# Altium PCB Board.PcbDoc (part 1 of 2)
Units mil, origin at the board's own origin, x right, y up, seen from the top; angles counter-clockwise.
Board outline 3359.57 x 1791.01 mil, 4 copper layers (Top Layer, GND, Power, Bottom Layer), stack 61.811 mil thick; 87 components, 83 nets, 345 pads, 431 vias.
Unrouted connection lines stored in the file: 1.
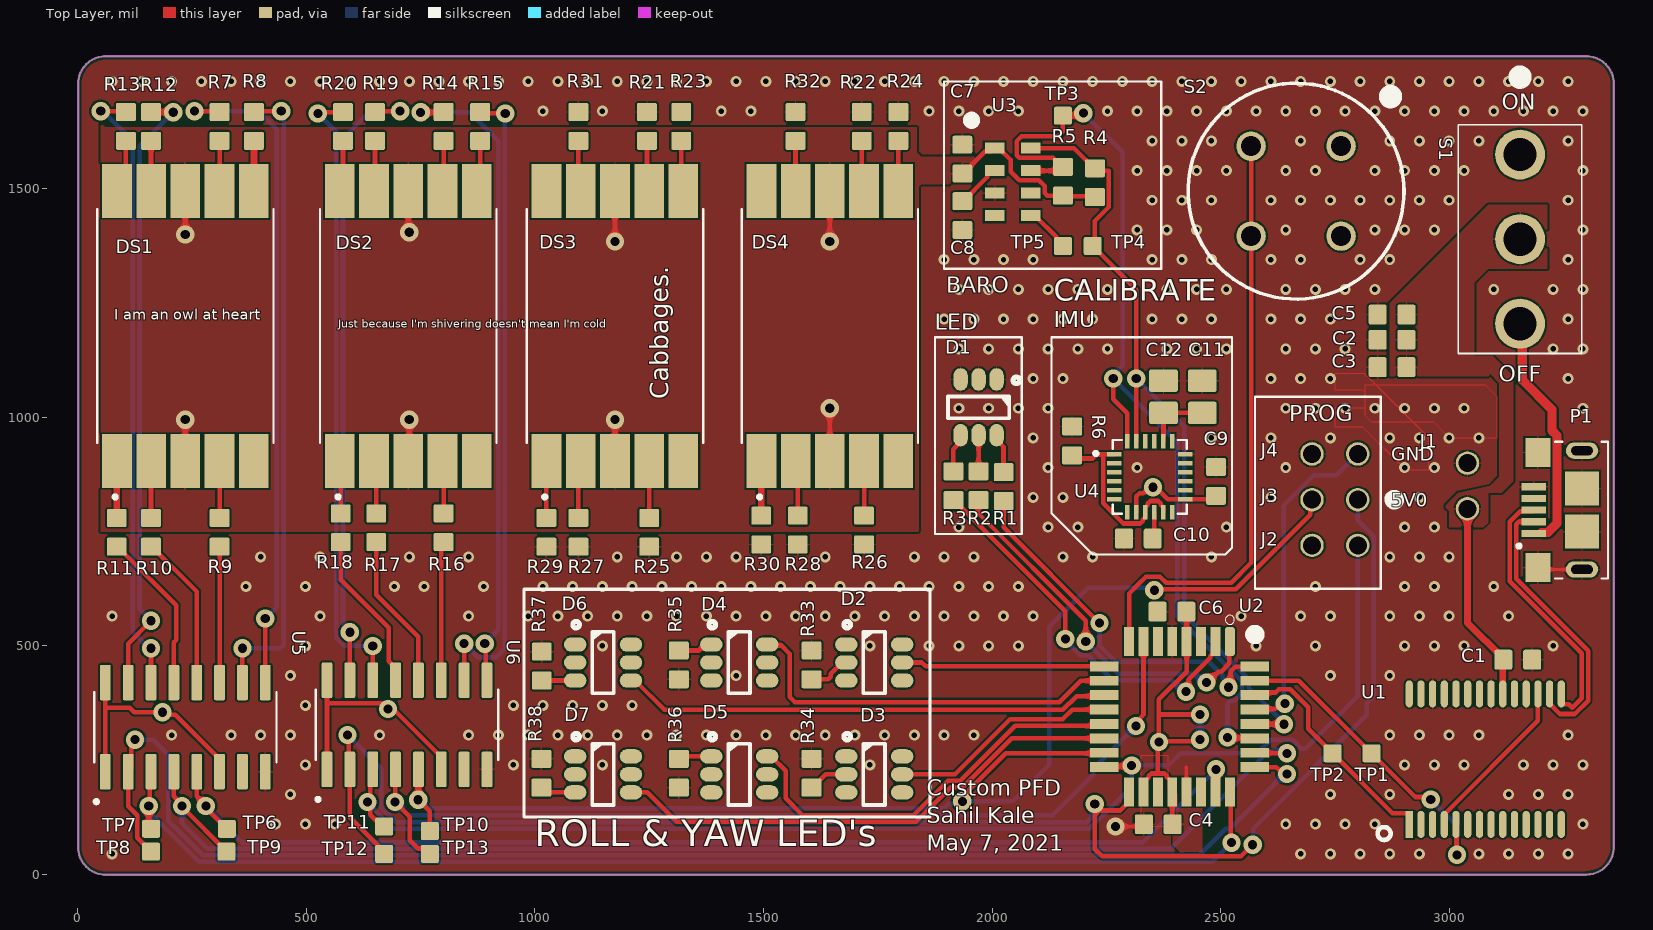
[diagram p0: Top Layer view]
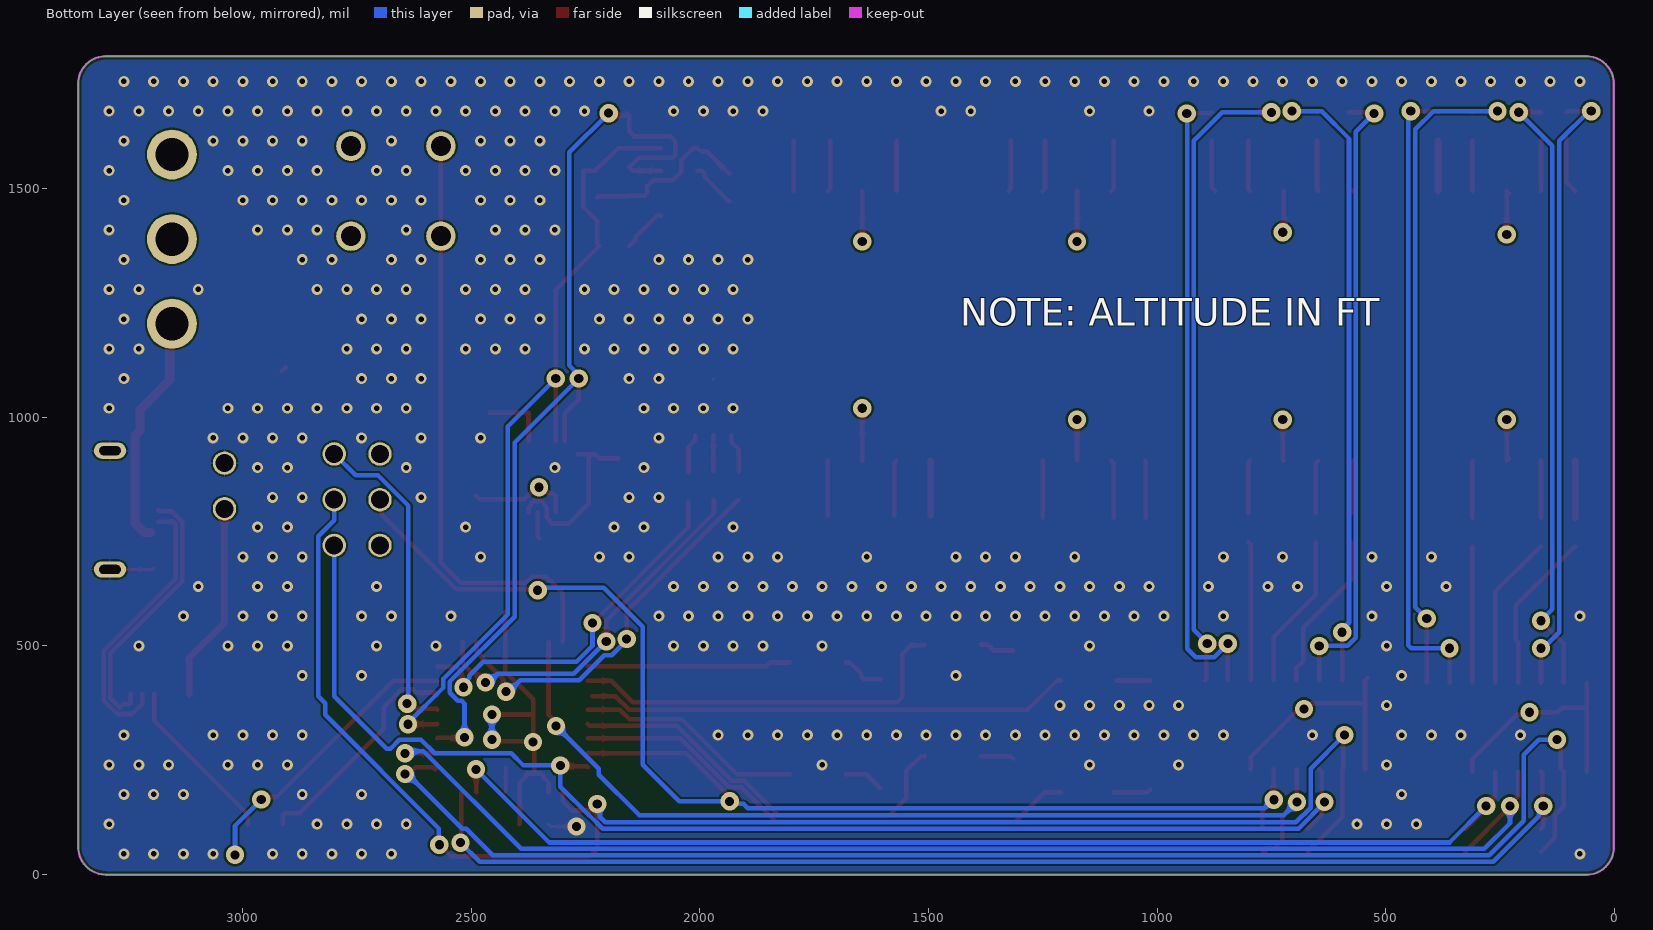
[diagram p1: Bottom Layer view, seen from below]
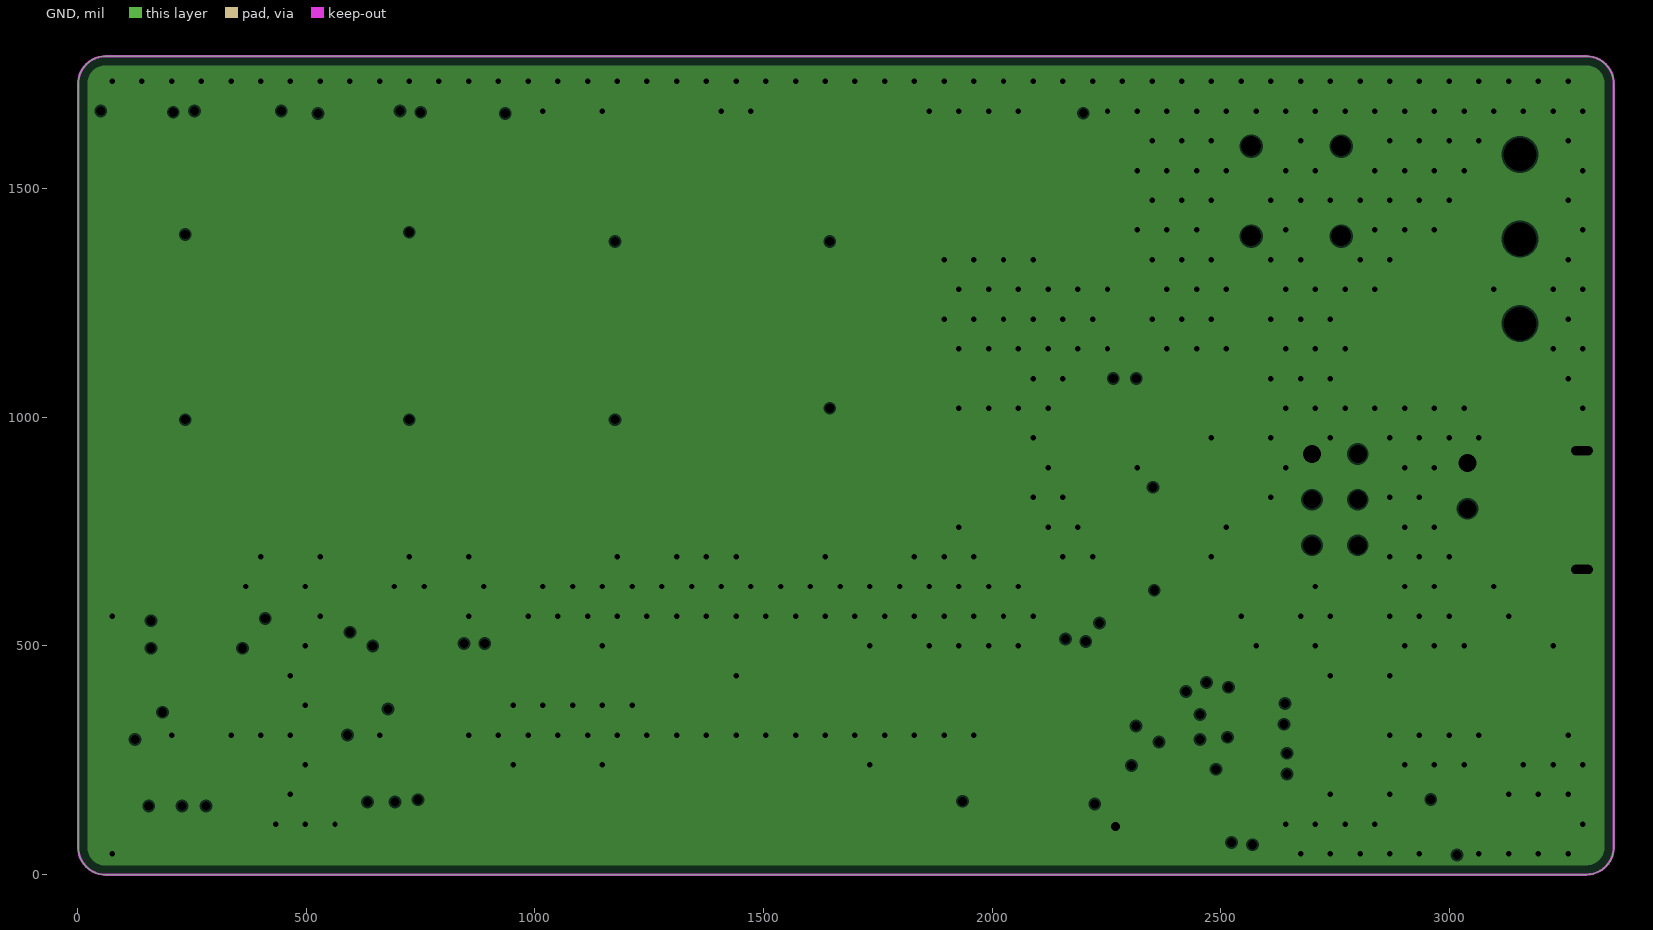
[diagram p2: GND, clearances drawn from the general rule]
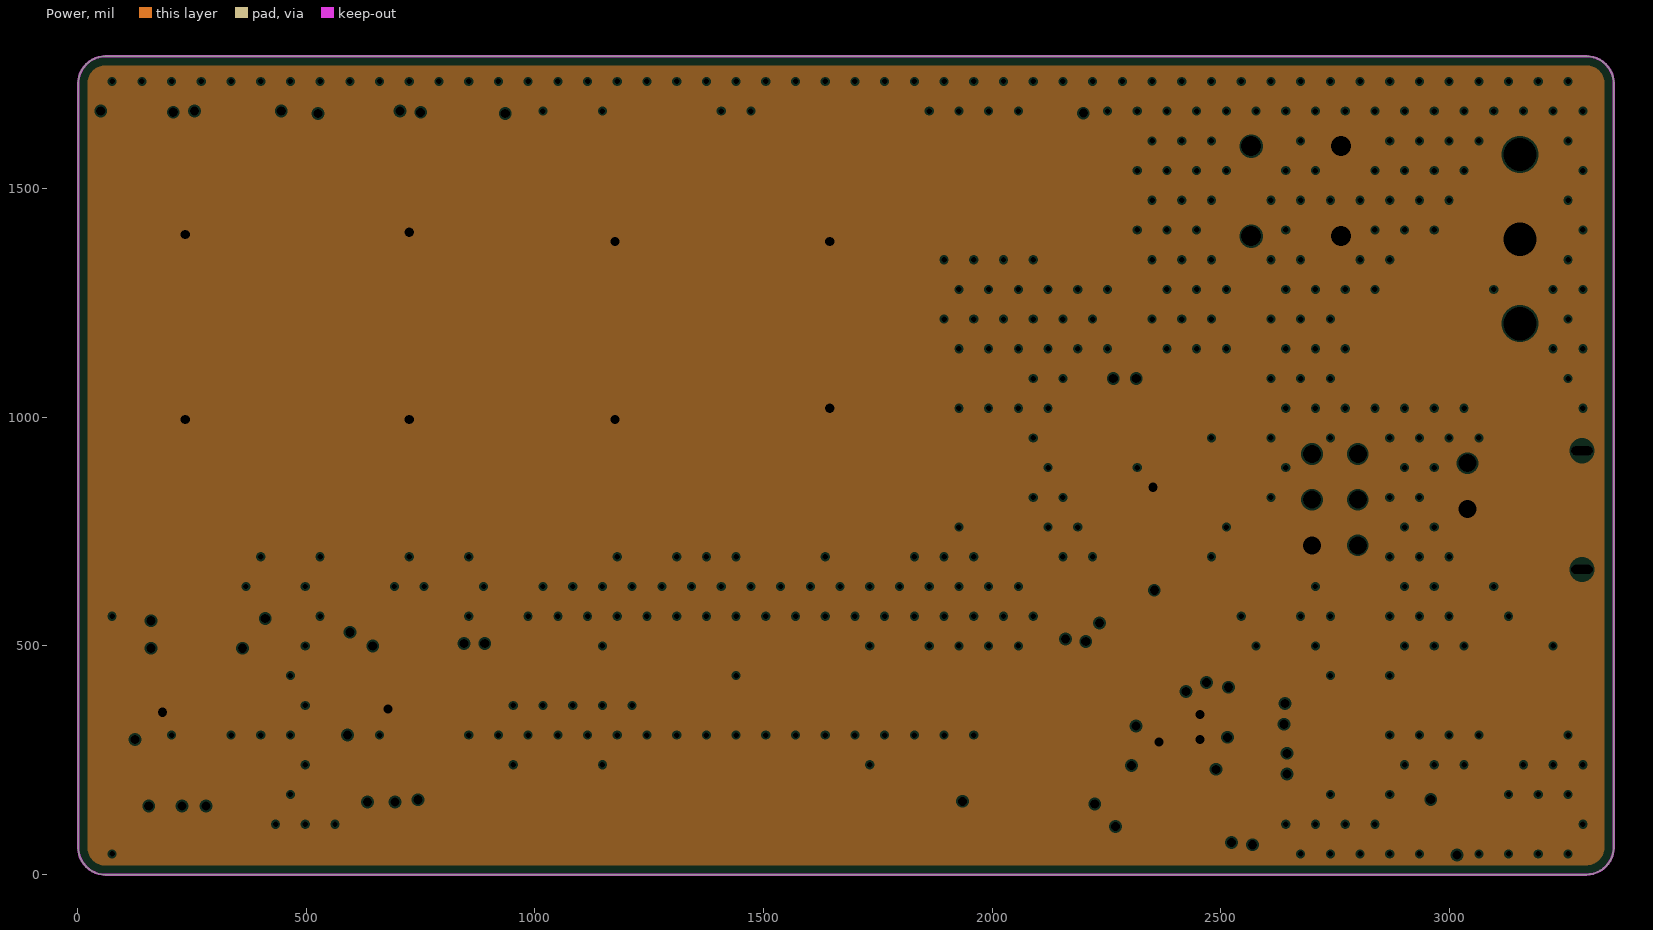
[diagram p3: Power, clearances drawn from the general rule]

## Layer stack, top to bottom
Top Solder: solder mask 0.5, Solder Resist, Dk 3.8
Top Layer: signal copper 1.378
Dielectric 1: prepreg 7.874, 7628, Dk 4.6
GND: plane copper 0.689, net GND
Core: core 41.929, FR-4, Dk 4.5
Power: plane copper 0.689, net 3V3
Dielectric 2: prepreg 7.874, 7628, Dk 4.6
Bottom Layer: signal copper 1.378
Bottom Solder: solder mask 0.5, Solder Resist, Dk 3.8

## Board outline
60.84,-0.8 cw(c60.84,59.41) 0.63,59.41 0.63,1730 cw(c60.84,1730) 60.84,1790.21 3300,1790.21 cw(c3300,1730) 3360.21,1730 3360.21,60 cw(c3300,60) 3300,-0.21 cw(c3298.56,1.23) 3298.56,-0.8

## Design rules (kind name [scope] priority, off if disabled: settings)
BoardOutlineClearance [All] p1: gap=7.87 ignorepadtopadclearanceinfootprint=FALSE
Clearance [All] p1: gap=4 ignorepadtopadclearanceinfootprint=FALSE except(5: Arc-Via Track-Via SMDPad-Via THPad-Via Via-Via Via-Fill Via-Poly Via-Region Via-Text; 9.84: Arc-Hole Track-Hole SMDPad-Hole THPad-Hole Via-Hole Fill-Hole Poly-Hole Region-Hole Text-Hole)
ComponentClearance [All] p1: gap=4 collisioncheckmode=3 verticalgap=4 showdistances=TRUE
DiffPairsRouting [All] p1: maxlimit=4 minlimit=4 mostfreqgap=4 toplayer_minwidth=4 toplayer_maxwidth=71497.94 toplayer_prefwidth=4 bottomlayer_minwidth=4 bottomlayer_maxwidth=71497.94 bottomlayer_prefwidth=4 maxuncoupledlength=500
Height [All] p1: minheight=0 maxheight=71497.94 prefheight=500
HoleSize [All] p1: absolutevalues=TRUE maxlimit=248.03 minlimit=7.87 maxpercent=80.000 minpercent=20.000
HoleToHoleClearance [All] p1: gap=9.84 allowstackedmicrovias=FALSE
MinimumAnnularRing [All] p1: minimumring=3
MinimumSolderMaskSliver [All] p1: minsoldermaskwidth=0
PlaneClearance [All] p1: clearance=4
PlaneConnect PlaneConnectPowerPads [InPadClass('PowerPads')] p1: planeconnectstyle=Direct reliefexpansion=20 reliefentries=4 reliefconductorwidth=10 reliefairgap=10
PlaneConnect [All] p2: pad.planeconnectstyle=Relief pad.reliefexpansion=11.81 pad.reliefentries=4 pad.reliefconductorwidth=4 pad.reliefairgap=4 via.planeconnectstyle=Direct via.reliefexpansion=11.81 via.reliefentries=4 via.reliefconductorwidth=5 via.reliefairgap=5
PolygonConnect PolygonConnectPowerPads [All vs (InPadClass('PowerPads'))] p1: connectstyle=Direct reliefconductorwidth=10 reliefentries=4 polygonreliefangle="90 Angle" airgapwidth=10
PolygonConnect [All] p2: thpad.connectstyle=Relief thpad.reliefconductorwidth=4 thpad.reliefentries=4 thpad.polygonreliefangle="90 Angle" thpad.airgapwidth=4 smdpad.connectstyle=Relief smdpad.reliefconductorwidth=4 smdpad.reliefentries=4 smdpad.polygonreliefangle="90 Angle" smdpad.airgapwidth=4 via.connectstyle=Direct via.reliefconductorwidth=5 via.reliefentries=4 via.polygonreliefangle="90 Angle" via.airgapwidth=5
RoutingVias [All] p1: holewidth=7.87 width=17.72 viastyle="Through Hole" minholewidth=7.87 minwidth=17.72 maxholewidth=248.03 maxwidth=257.87
SilkToSilkClearance [All] p1: silktosilkclearance=0
SilkToSolderMaskClearance [IsPad] p1: minsilkscreentomaskgap=4 clearancetoexposedcopper=TRUE
SolderMaskExpansion SolderMaskExpansion_1 [isVia] p1: expansion=4 istentingtop=TRUE
SolderMaskExpansion [All] p2: expansion=2.95 istentingtop=FALSE
Width [All] p1: maxlimit=71497.94 minlimit=4 preferedwidth=4
20 further rules are at their usual default settings.

## Classes and differential pairs
component class Coordination: D2 D3 D4 D5 D6 D7 R33 R34 R35 R36 R37 R38
component class "USB and Power": C1 C2 D1 J1 P1 R1 R2 R3 S1 TP1 TP2 U1
component class Sensors: C7 C8 C9 C10 C11 C12 R4 R5 R6 TP5 U3 U4
component class "Display Alt": DS1 DS2 DS3 DS4 R7 R8 R9 R10 R11 R12 R13 R14 R15 R16 R17 R18 R19 R20 R21 R22 R23 R24 R25 R26 R27 R28 R29 R30 R31 R32 TP6 TP7 TP8 TP9 TP10 TP11 TP12 TP13 U5 U6
component class Controller: C5 J2 J3 J4 S2 TP3 TP4 U2
differential pair USB: +USB_P -USB_N

## Components (designator, comment, footprint, x,y, rotation, side; value= is the part's Value field where it differs from the comment)
C1 "CAP_0.1uF_50V_0603" CAP0603 3150,470 r180 top value=0.1μF
C2 "CAP_4.7uF_16V_0603" CAP0603 2875,1170 r0 top value=4.7μF
C3 "CAP_0.1uF_16V_0603" CAP0603 2875,1110 r0 top value=0.1μF
C4 "CAP_0.1uF_16V_0603" CAP0603 2363.5,110 r0 top value=0.1μF
C5 "CAP_0.1uF_16V_0603" CAP0603 2875,1225 r0 top value=0.1μF
C6 "CAP_0.1uF_16V_0603" CAP0603 2393.5,575 r0 top value=0.1μF
C7 "CAP_0.1uF_16V_0603" CAP0603 1935,1565 r270 top value=0.1μF
C8 "CAP_0.1uF_16V_0603" CAP0603 1935,1441.5 r90 top value=0.1μF
C9 "CAP_0.1uF_16V_0603" CAP0603 2490,860 r270 top value=0.1μF
C10 "CAP_0.1uF_16V_0603" CAP0603 2320,735 r0 top value=0.1μF
C11 "CAP_1000pF_50V_0805" CAP0805 2460,1045 r270 top value=1000pF
C12 "CAP_1000pF_50V_0805" CAP0805 2375,1045 r270 top value=1000pF
D1 "LED_RGB_CLX6F" SOJ100P350X290-6N 1970.44,1021.97 r270 top
D2 "LED_RGB_CLX6F" SOJ100P350X290-6N 1742.06,463.72 r0 top
D3 "LED_RGB_CLX6F" SOJ100P350X290-6N 1742.06,218.85 r0 top
D4 "LED_RGB_CLX6F" SOJ100P350X290-6N 1446.82,463.72 r0 top
D5 "LED_RGB_CLX6F" SOJ100P350X290-6N 1446.82,218.85 r0 top
D6 "LED_RGB_CLX6F" SOJ100P350X290-6N 1148.99,463.72 r0 top
D7 "LED_RGB_CLX6F" SOJ100P350X290-6N 1148.99,218.85 r0 top
DS1 "VDMG10A0" DISPLAY_VDMG10A0 235,1200 r90 top
DS2 "VDMG10A0" DISPLAY_VDMG10A0 722.67,1200 r90 top
DS3 "VDMG10A0" DISPLAY_VDMG10A0 1175,1200 r90 top
DS4 "VDMG10A0" DISPLAY_VDMG10A0 1645,1200 r90 top
J1 "PIN_HEADER_1X2" "PIN_HEADER - 1X2" 3040,800 r0 top
J2 "PIN_HEADER_1X2" "PIN_HEADER - 1X2" 2700,720 r270 top
J3 "PIN_HEADER_1X2" "PIN_HEADER - 1X2" 2700,820 r270 top
J4 "PIN_HEADER_1X2" "PIN_HEADER - 1X2" 2700,920 r270 top
P1 "Micro Type B" FCI_10118193-0001LF 3237.93,797.24 r90 top
R1 "RES_120Ω_0603" RES0603 2025.44,879.96 r270 top value=120Ω
R2 "RES_120Ω_0603" RES0603 1970.44,881.97 r270 top value=120Ω
R3 "RES_120Ω_0603" RES0603 1915.44,881.97 r270 top value=120Ω
R4 "RES_4.7kΩ_0603" RES0603 2225,1482.01 r90 top value=4.7kΩ
R5 "RES_4.7kΩ_0603" RES0603 2155,1485 r90 top value=4.7kΩ
R6 "RES_4.7kΩ_0603" RES0603 2175,917.01 r90 top value=4.7kΩ
R7 "470R 1%" RES0603 310,1667.99 r270 top value=470Ω
R8 "470R 1%" RES0603 385,1667.99 r270 top value=470Ω
R9 "470R 1%" RES0603 310,717.01 r90 top value=470Ω
R10 "470R 1%" RES0603 160,717.01 r90 top value=470Ω
R11 "470R 1%" RES0603 85,717.01 r90 top value=470Ω
R12 "470R 1%" RES0603 160,1667.99 r270 top value=470Ω
R13 "470R 1%" RES0603 105,1667.99 r270 top value=470Ω
R14 "470R 1%" RES0603 800,1667.99 r270 top value=470Ω
R15 "470R 1%" RES0603 880,1667.99 r270 top value=470Ω
R16 "470R 1%" RES0603 800,727.01 r90 top value=470Ω
R17 "470R 1%" RES0603 652.8,727.01 r90 top value=470Ω
R18 "470R 1%" RES0603 575,727.01 r90 top value=470Ω
R19 "470R 1%" RES0603 650,1667.99 r270 top value=470Ω
R20 "470R 1%" RES0603 580,1667.99 r270 top value=470Ω
R21 "470R 1%" RES0603 1245,1667.99 r270 top value=470Ω
R22 "470R 1%" RES0603 1715,1667.99 r270 top value=470Ω
R23 "RES_120Ω_0603" RES0603 1320,1667.99 r270 top value=120Ω
R24 "470R 1%" RES0603 1795,1667.99 r270 top value=470Ω
R25 "470R 1%" RES0603 1250,717.01 r90 top value=470Ω
R26 "470R 1%" RES0603 1720,722.01 r90 top value=470Ω
R27 "470R 1%" RES0603 1095,717.01 r90 top value=470Ω
R28 "470R 1%" RES0603 1575,722.01 r90 top value=470Ω
R29 "470R 1%" RES0603 1025,717.01 r90 top value=470Ω
R30 "470R 1%" RES0603 1495,722.01 r90 top value=470Ω
R31 "470R 1%" RES0603 1095,1667.99 r270 top value=470Ω
R32 "470R 1%" RES0603 1570,1667.99 r270 top value=470Ω
R33 "470R 1%" RES0603 1605,490 r270 top value=470Ω
R34 "470R 1%" RES0603 1605,252.99 r270 top value=470Ω
R35 "470R 1%" RES0603 1314.76,427.01 r90 top value=470Ω
R36 "470R 1%" RES0603 1314.76,190 r90 top value=470Ω
R37 "470R 1%" RES0603 1015,487.35 r270 top value=470Ω
R38 "470R 1%" RES0603 1013.99,252.99 r270 top value=470Ω
S1 "SW_TOGGLE_SPDT" 100SP1T1B4M2QE 3155,1390 r270 top
S2 "SW_MOMENTARY_SPST" D6R 2665,1495 r90 top
TP1 "TESTPT" "TESTPT SQUARE" 2830,265 r180 top
TP2 "TESTPT" "TESTPT SQUARE" 2745,265 r180 top
TP3 "TESTPT" "TESTPT SQUARE" 2155,1660 r90 top
TP4 "TESTPT" "TESTPT SQUARE" 2220,1375 r90 top
TP5 "TESTPT" "TESTPT SQUARE" 2155,1375 r90 top
TP6 "TESTPT" "TESTPT SQUARE" 325.73,100 r90 top
TP7 "TESTPT" "TESTPT SQUARE" 160,100 r90 top
TP8 "TESTPT" "TESTPT SQUARE" 160,50 r90 top
TP9 "TESTPT" "TESTPT SQUARE" 325,50 r90 top
TP10 "TESTPT" "TESTPT SQUARE" 770,95 r90 top
TP11 "TESTPT" "TESTPT SQUARE" 670,105 r90 top
TP12 "TESTPT" "TESTPT SQUARE" 670,45 r90 top
TP13 "TESTPT" "TESTPT SQUARE" 770,45 r90 top
U1 "FT232RL" FT232RL 2912.64,109.57 r90 top
U2 "ATMEGA328PB-AU" QFP80P900X900X120-32N 2410,345 r270 top
U3 "MPL115A2" "LGA8 - MPL115A2" 2045,1515 r0 top
U4 "MPU-6050" QFN50P400X400X95-24N 2345,870 r0 top
U5 "CD4543BM96" SOIC127P600X175-16N 235,322.44 r90 top
U6 "CD4543BM96" SOIC127P600X175-16N 720,327.44 r90 top

## Footprints (in the part's own frame and the unit in brackets; to place one, negate y for a bottom-side part, rotate by r counter-clockwise, add the part's x,y. Pads: shape width x height; smd on the part's side, far side on the other; paste and mask are expansions set on the pad)
100SP1T1B4M2QE [mm]
  round 2.775 hole 1.85: 1(-4.7,0) 2(0,0) 3(4.7,0)
  silkscreen extent -9.3,-3.43 6.35,3.43, body extent -6.35,-3.43 6.35,3.43, height 29.63
CAP0603 [mm]
  rrect20% 1x1.1 smd: 1(-0.8,0) 2(0.8,0)
  body extent -0.87,-0.48 0.88,0.48, height 0.87
CAP0805 [mm]
  rrect20% 1.25x1.6 smd: 1(-0.895,0) 2(0.895,0)
  body extent -1.1,-0.7 1.1,0.75, height 1.41
D6R [mm]
  round 1.64 hole 1.1: 1(2.5,-2.5) 2(-2.5,-2.5) 3(-2.5,2.5) 4(2.5,2.5)
  silkscreen extent -6,-6 6,6, body extent -5.4,-6 6,6, height 12.8
DISPLAY_VDMG10A0 [mm]
  rect 3x1.65 smd: 1(-7.5,3.8) 2(-7.5,1.9) 3(-7.5,0) 4(-7.5,-1.9) 5(-7.5,-3.8) 6(7.5,-3.8) 7(7.5,-1.9) 8(7.5,0) 9(7.5,1.9) 10(7.5,3.8)
  silkscreen extent -9.6,-4.9 6.5,4.9, body extent -7.63,-4.85 7.37,4.95, height 4
FCI_10118193-0001LF [mm]
  rect 0.4x1.35 smd: 1(-1.3,1.338) 2(-0.65,1.338) 3(0,1.338) 4(0.65,1.338) 5(1.3,1.338)
  rect 1.6x1.4 smd: S1(-3.2,1.112) S2(3.2,1.112)
  rect 1.9x1.9 smd: S3(1.2,-1.338) S4(-1.2,-1.338)
  oval 0.9x1.8 hole 0.5 slot 1.2 at 90 deg: S5(-3.3,-1.338) S6(3.3,-1.338)
  silkscreen extent -3.8,-2.79 3.8,2.26, body extent -3.94,-4.07 3.92,1.64, height 2.8
FT232RL [mm]
  rect 1.5x0.4 smd: 1(0,0)
  oval 1.5x0.4 smd: 2(0,-0.65) 3(0,-1.3) 4(0,-1.95) 5(0,-2.6) 6(0,-3.25) 7(0,-3.9) 8(0,-4.55) 9(0,-5.2) 10(0,-5.85) 11(0,-6.5) 12(0,-7.15) 13(0,-7.8) 14(0,-8.45) 15(7.25,-8.45) 16(7.25,-7.8) 17(7.25,-7.15) 18(7.25,-6.5) 19(7.25,-5.85) 20(7.25,-5.2) 21(7.25,-4.55) 22(7.25,-3.9) 23(7.25,-3.25) 24(7.25,-2.6) 25(7.25,-1.95) 26(7.25,-1.3) 27(7.25,-0.65) 28(7.25,0)
  silkscreen extent -0.87,1.04 -0.15,1.75, body extent -0.09,-9.31 7.71,0.89, height 2
"LGA8 - MPL115A2" [mil]
  rect 43x24 smd: 1(-39.5,73.82) 2(-39.5,24.61) 3(-39.5,-24.61) 4(-39.5,-73.82) 5(39.5,-73.82) 6(39.5,-24.61) 7(39.5,24.61) 8(39.5,73.82)
  silkscreen extent -95,130 -85,140, body extent -59,-84 59,95, height 39
"PIN_HEADER - 1X2" [mm]
  round 1.3 hole 1: 1(0,0) 2(0,2.54)
  body extent -1.27,-1.29 1.27,3.79, height 8.38
QFN50P400X400X95-24N [mm]
  rect 0.79x0.26 smd: 1(-1.97,1.25) 2(-1.97,0.75) 3(-1.97,0.25) 4(-1.97,-0.25) 5(-1.97,-0.75) 6(-1.97,-1.25) 13(1.97,-1.25) 14(1.97,-0.75) 15(1.97,-0.25) 16(1.97,0.25) 17(1.97,0.75) 18(1.97,1.25)
  rect 0.26x0.79 smd: 7(-1.25,-1.97) 8(-0.75,-1.97) 9(-0.25,-1.97) 10(0.25,-1.97) 11(0.75,-1.97) 12(1.25,-1.97) 19(1.25,1.97) 20(0.75,1.97) 21(0.25,1.97) 22(-0.25,1.97) 23(-0.75,1.97) 24(-1.25,1.97)
  silkscreen extent -3.1,-2.05 2.05,2.05, body extent -2,-2 2,2, height 0.93
QFP80P900X900X120-32N [mm]
  rrect50% 1.6x0.55 smd: 1(-4.18,2.8)
  rect 1.6x0.55 smd: 2(-4.18,2) 3(-4.18,1.2) 4(-4.18,0.4) 5(-4.18,-0.4) 6(-4.18,-1.2) 7(-4.18,-2) 8(-4.18,-2.8) 17(4.18,-2.8) 18(4.18,-2) 19(4.18,-1.2) 20(4.18,-0.4) 21(4.18,0.4) 22(4.18,1.2) 23(4.18,2) 24(4.18,2.8)
  rect 0.55x1.6 smd: 9(-2.8,-4.18) 10(-2,-4.18) 11(-1.2,-4.18) 12(-0.4,-4.18) 13(0.4,-4.18) 14(1.2,-4.18) 15(2,-4.18) 16(2.8,-4.18) 25(2.8,4.18) 26(2,4.18) 27(1.2,4.18) 28(0.4,4.18) 29(-0.4,4.18) 30(-1.2,4.18) 31(-2,4.18) 32(-2.8,4.18)
  silkscreen extent -5.64,2.55 -4.45,4.32, body extent -4.5,-4.43 4.5,4.57, height 1.23
RES0603 [mm] "Chip Resistor, Body 1.6x0.8mm, IPC Medium Density"
  rrect15% 1x1.1 smd: 1(0,0) 2(1.6,0)
  body extent 0,-0.4 1.6,0.4, height 0.46
SOIC127P600X175-16N [mm]
  rrect25% 1.97x0.6 smd: 1(-2.475,4.445) 2(-2.475,3.175) 3(-2.475,1.905) 4(-2.475,0.635) 5(-2.475,-0.635) 6(-2.475,-1.905) 7(-2.475,-3.175) 8(-2.475,-4.445) 9(2.475,-4.445) 10(2.475,-3.175) 11(2.475,-1.905) 12(2.475,-0.635) 13(2.475,0.635) 14(2.475,1.905) 15(2.475,3.175) 16(2.475,4.445)
  silkscreen extent -4.24,-5.06 1.95,5.06, body extent -3.13,-4.95 2.87,4.95, height 1.75
SOJ100P350X290-6N [mm]
  oval 1.25x0.8 smd: 1(-1.55,1) 2(-1.55,0) 3(-1.55,-1) 4(1.55,-1) 5(1.55,0) 6(1.55,1)
  silkscreen extent -1.72,-1.7 0.6,2.32, body extent -1.85,-1.75 1.85,1.75, height 2.82
"TESTPT SQUARE" [mm]
  rrect20% 1x1 smd: 1(0,0)

## Part data
C1: "CAP CER 0.1UF 50V X7R 0603", Dielectric=X7R, Manufacturer 1=Yageo, Manufacturer Part Number 1=CC0603KRX7R9BB104, Package/Footprint=0603, Supplier Part Number 1=311-1344-1-ND, Voltage Rating=50V, Mounting Type=SMD, Supplier 1=Digi-Key
C2: "CAP CER 4.7UF 16V X6S 0603", Dielectric=X6S, Manufacturer 1="Murata Electronics", Manufacturer Part Number 1=GRM188C81C475KE11D, Package/Footprint=0603, Supplier Part Number 1=490-13362-1-ND, Voltage Rating=16V, Mounting Type=SMD, Supplier 1=Digi-Key
C3 C4 C5 C6 C7 C8 C9 C10: "CAP CER 0.1UF 16V X7R 0603", Dielectric=X7R, Manufacturer 1=Yageo, Manufacturer Part Number 1=CC0603KRX7R7BB104, Package/Footprint=0603, Supplier Part Number 1=311-1088-1-ND, Voltage Rating=16V, Supplier 1=Digi-Key
C11 C12: "CAP CER 1000pF 50V X7R 0805", Dielectric=X7R, Manufacturer 1=Samsung, Manufacturer Part Number 1=CL21B102KBANNNC, Package/Footprint=0805, Supplier Part Number 1=1276-1020-1-ND, Voltage Rating=50V, Mounting Type=SMD, Supplier 1=Digi-Key
D1 D2 D3 D4 D5 D6 D7: "Visible LED", Manufacturer=Cree, Manufacturer Part Number=CLX6F-FKC-CKNNQDGBB7A363, Package="PLCC-6 Cree", Supplier Part Number 1=CLX6F-FKC-CKNNQDGBB7A363CT-ND, Category=LEDs, ComponentLink1Description=https://datasheet.ciiva.com:443/pdfs/VipMasterIC/IC/CREE/CREE-S-A0009778122/CREE-S-A0009831345-1.pdf?src-supplier=IHS+Markit, ComponentLink1URL=https://datasheet.ciiva.com:443/pdfs/VipMasterIC/IC/CREE/CREE-S-A0009778122/CREE-S-A0009831345-1.pdf?src-supplier=IHS+Markit, ComponentLink2Description=http://www.farnell.com/datasheets/2813756.pdf?src-supplier=Farnell, ComponentLink2URL=http://www.farnell.com/datasheets/2813756.pdf?src-supplier=Farnell, ComponentLink3Description=http://www.mouser.com/ds/2/90/CLX6F-FKC-1352-1064258.pdf?src-supplier=Mouser, ComponentLink3URL=http://www.mouser.com/ds/2/90/CLX6F-FKC-1352-1064258.pdf?src-supplier=Mouser, ComponentLink4Description=http://www.farnell.com/datasheets/2813756.pdf?src-supplier=Element14, ComponentLink4URL=http://www.farnell.com/datasheets/2813756.pdf?src-supplier=Element14, ComponentLink5Description=http://www.farnell.com/datasheets/2813756.pdf?src-supplier=Newark, ComponentLink5URL=http://www.farnell.com/datasheets/2813756.pdf?src-supplier=Newark, ComponentLink6Description=https://www.cree.com/led-components/media/documents/CLX6F-FKC-1352.pdf?src-supplier=Digi-Key, ComponentLink6URL=https://www.cree.com/led-components/media/documents/CLX6F-FKC-1352.pdf?src-supplier=Digi-Key, Digi-Key_Part_Number=CLX6F-FKC-CKNNQDGBB7A363CT-ND, Digi-Key_Purchase_URL=https://www.digikey.de/product-detail/en/cree-inc/CLX6F-FKC-CKNNQDGBB7A363/CLX6F-FKC-CKNNQDGBB7A363CT-ND/9452642?utm_source=snapeda&utm_medium=aggregator&utm_campaign=symbol, MF="Cree Inc.", MP=CLX6F-FKC-CKNNQDGBB7A363, Optoelectronic Device Type="TRIPLE COLOR LED", Pricing 1="1=0.30000, 10=0.27900, 100=0.25800, 1000=0.23077 (USD)", REACH SVHC="No SVHC", RoHS=Yes, RoHS Compliant=Yes, SnapEDA_Link=https://www.snapeda.com/parts/CLX6F-FKC-CKNNQDGBB7A363/Cree%20Inc./view-part/641291/?ref=snap, Stock 1=37409, Supplier 1=Digi-Key
DS1 DS2 DS3 DS4: library part "7 SEG DISPLAY - VDMG10A0", "Smart/Normal 7 Seg Numeric LED Display", Manufacturer="Vishay Semiconductors", Package="SMD-10 Vishay", Supplier Part Number 1=VDMG10A0CT-ND, Category="LED Displays", ComponentLink1Description=https://datasheet.ciiva.com:443/pdfs/VipMasterIC/IC/VISH/VISH-S-A0001108912/VISH-S-A0001108912-1.pdf?src-supplier=IHS+Markit, ComponentLink1URL=https://datasheet.ciiva.com:443/pdfs/VipMasterIC/IC/VISH/VISH-S-A0001108912/VISH-S-A0001108912-1.pdf?src-supplier=IHS+Markit, ComponentLink2Description=https://datasheet.ciiva.com/24075/vdmx10x0-272413-24075313.pdf?src-supplier=Mouser, ComponentLink2URL=https://datasheet.ciiva.com/24075/vdmx10x0-272413-24075313.pdf?src-supplier=Mouser, ComponentLink3Description=https://datasheet.ciiva.com/23867/vdmx10x0-23867376.pdf?src-supplier=Newark, ComponentLink3URL=https://datasheet.ciiva.com/23867/vdmx10x0-23867376.pdf?src-supplier=Newark, ComponentLink4Description=https://datasheet.ciiva.com/29566/vdmx10x0-29566054.pdf?src-supplier=Digi-Key, ComponentLink4URL=https://datasheet.ciiva.com/29566/vdmx10x0-29566054.pdf?src-supplier=Digi-Key, ComponentLink5Description=https://datasheet.ciiva.com/29566/vdmx10x0-29566055.pdf?src-supplier=Digi-Key, ComponentLink5URL=https://datasheet.ciiva.com/29566/vdmx10x0-29566055.pdf?src-supplier=Digi-Key, ComponentLink6Description=https://datasheet.ciiva.com/29566/vdmx10x0-29566056.pdf?src-supplier=Digi-Key, ComponentLink6URL=https://datasheet.ciiva.com/29566/vdmx10x0-29566056.pdf?src-supplier=Digi-Key, ComponentLink7Description=https://datasheet.ciiva.com/30017/vdmx10x0-30017276.pdf?src-supplier=Avnet, ComponentLink7URL=https://datasheet.ciiva.com/30017/vdmx10x0-30017276.pdf?src-supplier=Avnet, ComponentLink8Description=https://datasheet.ciiva.com/23867/1809851-23867367.pdf?src-supplier=Newark, ComponentLink8URL=https://datasheet.ciiva.com/23867/1809851-23867367.pdf?src-supplier=Newark, ComponentLink9Description=https://datasheet.ciiva.com/22726/1913356-22726255.pdf?src-supplier=Element14, ComponentLink9URL=https://datasheet.ciiva.com/22726/1913356-22726255.pdf?src-supplier=Element14, ComponentLink10Description=https://datasheet.ciiva.com/24208/vdmx10x0-24208888.pdf?src-supplier=Future+Electronics, ComponentLink10URL=https://datasheet.ciiva.com/24208/vdmx10x0-24208888.pdf?src-supplier=Future+Electronics, Manufacturer Part Number=VDMG10A0, MP=VDMG10A0, Optoelectronic Device Type="SMART/NORMAL 7 SEG NUMERIC LED DISPLAY", Pricing 1="1=1.55000, 10=1.38200, 100=1.07760 (USD)", REACH SVHC="No SVHC", RoHS=Yes, RoHS Compliant=Yes, Stock 1=6191, Supplier 1=Digi-Key
J1 J2 J3 J4: "Board Connector, 1 Contact(s), 1 Row(s), Male, Straight, Solder Terminal", Flammability Rating="UL94 V-0", Manufacturer=Sullins, Manufacturer Part Number=PREC001SAAN-RC, Supplier Part Number 1=S1012EC-01-ND, Category=Connectors, ComponentLink1Description=https://datasheet.ciiva.com:443/pdfs/VipMasterIC/IC/SUCS/SUCS-S-A0005121173/SUCS-S-A0005121173-1.pdf?src-supplier=IHS+Markit, ComponentLink1URL=https://datasheet.ciiva.com:443/pdfs/VipMasterIC/IC/SUCS/SUCS-S-A0005121173/SUCS-S-A0005121173-1.pdf?src-supplier=IHS+Markit, ComponentLink2Description=https://datasheet.ciiva.com/740/zrzczzzszzn-rc-st-11635-b-740844.pdf?src-supplier=Digi-Key, ComponentLink2URL=https://datasheet.ciiva.com/740/zrzczzzszzn-rc-st-11635-b-740844.pdf?src-supplier=Digi-Key, Connector Type="BOARD CONNECTOR", Contact Gender=Male, DIN Conformance=No, Filter Feature=No, IEC Conformance=No, MIL Conformance=No, Mixed Contacts=No, Mount=Board, Mounting Style=STRAIGHT, Number of Contacts=1, Number of Rows Loaded=1, Option="General Purpose", Pricing 1="1=0.04000, 10=0.03000, 25=0.02800, 50=0.02080, 100=0.01780, 250=0.01724, 500=0.01486 (USD)", RoHS=Yes, Stock 1=16681, Supplier 1=Digi-Key, Termination=Solder
P1: library part "USB Connector", "USB Connector, 5 Contact(s), Female, Right Angle, Solder Terminal, Locking, Receptacle", Contact Resistance=30mR, Flammability Rating="UL94 V-0", Insulation Resistance=1GR, Manufacturer="Amphenol FCI", Manufacturer Part Number=10118193-0001LF, Manufacturer Series=10118193, Rated Current (Signal)=1.8A, Supplier Part Number 1=609-4616-1-ND, Board Mounting Option="LOCATING POSTS", Body Breadth=0.122inch, Body Depth=0.199inch, Body Length=0.309inch, Body/Shell Style=RECEPTACLE, Category="USB Connectors", ComponentLink1Description=https://datasheet.ciiva.com:443/pdfs/VipMasterIC/IC/FRCI/FRCI-S-A0000088532/FRCI-S-A0001133856-1.pdf?src-supplier=IHS+Markit, ComponentLink1URL=https://datasheet.ciiva.com:443/pdfs/VipMasterIC/IC/FRCI/FRCI-S-A0000088532/FRCI-S-A0001133856-1.pdf?src-supplier=IHS+Markit, ComponentLink2Description=https://datasheet.ciiva.com/851/10118193-851106.pdf?src-supplier=Digi-Key, ComponentLink2URL=https://datasheet.ciiva.com/851/10118193-851106.pdf?src-supplier=Digi-Key, ComponentLink3Description=https://datasheet.ciiva.com/26853/getdatasheetpartid-418618-26853893.pdf?src-supplier=Verical, ComponentLink3URL=https://datasheet.ciiva.com/26853/getdatasheetpartid-418618-26853893.pdf?src-supplier=Verical, ComponentLink4Description=https://datasheet.ciiva.com/4598/10118193ac-197151-4598799.pdf?src-supplier=Mouser, ComponentLink4URL=https://datasheet.ciiva.com/4598/10118193ac-197151-4598799.pdf?src-supplier=Mouser, ComponentLink5Description=https://datasheet.ciiva.com/14802/10118193-0001lf-webpage-14802386.pdf?src-supplier=Arrow+Electronics, ComponentLink5URL=https://datasheet.ciiva.com/14802/10118193-0001lf-webpage-14802386.pdf?src-supplier=Arrow+Electronics, ComponentLink6Description=https://datasheet.ciiva.com/851/10118193-851107.pdf?src-supplier=Digi-Key, ComponentLink6URL=https://datasheet.ciiva.com/851/10118193-851107.pdf?src-supplier=Digi-Key, ComponentLink7Description=https://datasheet.ciiva.com/851/10118193-851108.pdf?src-supplier=Digi-Key, ComponentLink7URL=https://datasheet.ciiva.com/851/10118193-851108.pdf?src-supplier=Digi-Key, ComponentLink8Description=https://datasheet.ciiva.com/14618/70236827-14618887.pdf?src-supplier=Allied+Electronics, ComponentLink8URL=https://datasheet.ciiva.com/14618/70236827-14618887.pdf?src-supplier=Allied+Electronics, Connector Type="TELECOM AND DATACOM CONNECTOR", Contact Finish - Mating="GOLD (30) OVER NICKEL", Contact Finish - Termination="GOLD FLASH OVER NICKEL", Contact Gender=Female, Contact Material="Copper Alloy", Contact Style=USB, DIN Conformance=No, Durability=10000Cycles, Empty Shell=No, Filter Feature=No, IEC Conformance=No, Insertion Force-Max=35.1392N, Insulation Material=Polymer, JESD-609 Code=e4, Mating Information="MULTIPLE MATING PARTS AVAILABLE", MIL Conformance=No, Mixed Contacts=No, Mount=Board, Mounting Option 1=LOCKING, Mounting Style="RIGHT ANGLE", Number Of Connectors=1, Number of Contacts=5, Number Of PCB Rows=1, Option="General Purpose", PCB Contact Pattern=RECTANGULAR, Plating Thickness=30uin, Polarization Key="POLAR PIN POSITION", Pricing 1="1=0.45000, 10=0.43000, 25=0.36840, 50=0.31320, 100=0.30090, 250=0.27016, 500=0.25788 (USD)", Reference Standard=UL, Reliability=COMMERCIAL, RoHS=Yes, Shell Finish=Tin, Shell Material="Stainless Steel", Stock 1=43659, Supplier 1=Digi-Key, Terminal Pitch=0.6604mm, Termination=Solder
R1 R2 R3 R23: library part RES_120Ω_0603_5%, "RES 120 OHM 5% 1/10W 0603", Manufacturer 1=Yageo, Manufacturer Part Number 1=RC0603JR-07120RL, Package/Footprint=0603, Supplier Part Number 1=311-120GRCT-ND, Mounting Type=SMD, Supplier 1=Digi-Key
R4 R5 R6: library part RES_4.7kΩ_0603_5%, "RES 4.7K OHM 5% 1/10W 0603", Manufacturer 1=Yageo, Manufacturer Part Number 1=RC0603JR-074K7L, Supplier Part Number 1=311-4.7KGRCT-ND, Supplier 1=Digi-Key
R7 R8 R9 R10 R11 R12 R13 R14 R15 R16 R17 R18 R19 R20 R21 R22 R24 R25 R26 R27 R28 R29 R30 R31 R32 R33 R34 R35 R36 R37 R38: library part RES_470Ω_0603_1%, "RES 470 OHM 1% 1/10W 0603", Manufacturer 1=Yageo, Manufacturer Part Number 1=RC0603FR-07470RL, Supplier Part Number 1=311-470HRCT-ND, Footprint Size=0603, Supplier 1=Digi-Key
S1: "SWITCH TOGGLE SPDT 5A 120V", Manufacturer 1=E-Switch, Manufacturer Part Number 1=100SP1T1B4M2QE, Package/Footprint=TH, Supplier Part Number 1=EG2355-ND, Voltage Rating (DC)=28V, Mounting Type=TH, Supplier 1=Digi-Key, Throw Configuration=SPDT
S2: "SWITCH PUSH SPST-NO 0.1A 32V", Current Rating=100mA, Manufacturer 1="ITT C&K", Manufacturer Part Number 1=D6R50F2LFS, Max Voltage Rating (DC)=32V, Operating Force=2.5N, Supplier Part Number 1=401-1993-ND, Actuator Length=7mm, Actuator Type="Round, Button", Contact Plating=Silver, Electrical Life=250000Cycles, Max Current Rating=100mA, Number of Terminals=4, Orientation=Straight, Row Spacing=5mm, Supplier 1=Digi-Key, Switch Function=Off-Mom, Terminal Pitch=5mm, Throw Configuration=SPST, Voltage Rating (DC)=32V
TP1 TP2 TP3 TP4 TP5 TP6 TP7 TP8 TP9 TP10 TP11 TP12 TP13: library part "TESTPT SQUARE"
U1: "USB Bus Controller, CMOS, PDSO28", Manufacturer=FTDI, Manufacturer Part Number=FT232RL-REEL, Max Frequency=48MHz, Max Operating Temperature=85°C, Max Supply Current=100uA, Max Supply Voltage=5.25V, Min Operating Temperature=-40°C, Min Supply Voltage=3.3V, Package Body Material=Plastic, Package Code=SSOP, Package Shape=Rectangular, Package Style="SMALL OUTLINE, SHRINK PITCHMeter", Supplier Part Number 1=768-1007-1-ND, Temperature Grade=INDUSTRIAL, Category="Interface ICs", ComponentLink1Description=https://datasheet.ciiva.com:443/pdfs/VipMasterIC/IC/FTDI/FTDI-S-A0007980421/FTDI-S-A0007980421-1.pdf?src-supplier=IHS+Markit, ComponentLink1URL=https://datasheet.ciiva.com:443/pdfs/VipMasterIC/IC/FTDI/FTDI-S-A0007980421/FTDI-S-A0007980421-1.pdf?src-supplier=IHS+Markit, ComponentLink2Description=https://datasheet.ciiva.com/34304/2161019-34304054.pdf?src-supplier=Jameco, ComponentLink2URL=https://datasheet.ciiva.com/34304/2161019-34304054.pdf?src-supplier=Jameco, ComponentLink3Description=https://datasheet.ciiva.com/4787/ds-ft232r-11534-4787658.pdf?src-supplier=Mouser, ComponentLink3URL=https://datasheet.ciiva.com/4787/ds-ft232r-11534-4787658.pdf?src-supplier=Mouser, ComponentLink4Description=https://datasheet.ciiva.com/26841/ft232rl-reel-26841080.pdf?src-supplier=IIIC, ComponentLink4URL=https://datasheet.ciiva.com/26841/ft232rl-reel-26841080.pdf?src-supplier=IIIC, ComponentLink5Description=https://datasheet.ciiva.com/1787/ds-ft232r-1787047.pdf?src-supplier=Digi-Key, ComponentLink5URL=https://datasheet.ciiva.com/1787/ds-ft232r-1787047.pdf?src-supplier=Digi-Key, ComponentLink6Description=https://datasheet.ciiva.com/1787/ds-ft232r-1787048.pdf?src-supplier=Digi-Key, ComponentLink6URL=https://datasheet.ciiva.com/1787/ds-ft232r-1787048.pdf?src-supplier=Digi-Key, ComponentLink7Description=https://datasheet.ciiva.com/1787/ds-ft232r-1787049.pdf?src-supplier=Digi-Key, ComponentLink7URL=https://datasheet.ciiva.com/1787/ds-ft232r-1787049.pdf?src-supplier=Digi-Key, ComponentLink8Description=https://datasheet.ciiva.com/15150/getdatasheetpartid-643207-15150506.pdf?src-supplier=Verical, ComponentLink8URL=https://datasheet.ciiva.com/15150/getdatasheetpartid-643207-15150506.pdf?src-supplier=Verical, ComponentLink9Description=https://datasheet.ciiva.com/16200/ds-ft232r-16200652.pdf?src-supplier=Future+Electronics, ComponentLink9URL=https://datasheet.ciiva.com/16200/ds-ft232r-16200652.pdf?src-supplier=Future+Electronics, Height - Seated (Max)=2mm, JESD-30 Code=R-PDSO-G28, Length=10.2mm, Moisture Sensitivity Level=3, Number of Pins=28, Pricing 1="1=4.50000, 10=4.05000, 50=3.85000, 100=3.65000, 250=3.25000, 500=2.85002, 1000=2.65000 (USD)", Qualification Status="Not Qualified", RoHS=Yes, Stock 1=118964, Supplier 1=Digi-Key, Surface Mount=Yes, Technology=CMOS, Terminal Form="Gull Wing", Terminal Pitch=0.65mm, Terminal Position=DUAL, Width=5.3mm
U2: "RISC Microcontroller, 8-Bit, FLASH, AVR RISC CPU, 20MHz, CMOS, PQFP32", Manufacturer=Microchip, Package="TQFP-32 Microchip Technology", Supplier Part Number 1=ATMEGA328PB-AU-ND, Category=Microcontrollers, ComponentLink1Description=https://datasheet.ciiva.com:443/pdfs/VipMasterIC/IC/MCHP/MCHP-S-A0004276582/MCHP-S-A0004276582-1.pdf?src-supplier=IHS+Markit, ComponentLink1URL=https://datasheet.ciiva.com:443/pdfs/VipMasterIC/IC/MCHP/MCHP-S-A0004276582/MCHP-S-A0004276582-1.pdf?src-supplier=IHS+Markit, ComponentLink2Description=http://www.farnell.com/datasheets/2915218.pdf?src-supplier=Farnell, ComponentLink2URL=http://www.farnell.com/datasheets/2915218.pdf?src-supplier=Farnell, ComponentLink3Description=http://www.farnell.com/datasheets/2915218.pdf?src-supplier=Newark, ComponentLink3URL=http://www.farnell.com/datasheets/2915218.pdf?src-supplier=Newark, ComponentLink4Description=http://www.microchip.com/mymicrochip/filehandler.aspx?ddocname=en589666&src-supplier=Digi-Key, ComponentLink4URL=http://www.microchip.com/mymicrochip/filehandler.aspx?ddocname=en589666&src-supplier=Digi-Key, Digi-Key_Part_Number=ATMEGA328PB-AU-ND, Digi-Key_Purchase_URL=https://www.digikey.com/product-detail/en/microchip-technology/ATMEGA328PB-AU/ATMEGA328PB-AU-ND/5638812?utm_source=snapeda&utm_medium=aggregator&utm_campaign=symbol, Manufacturer Part Number=ATMEGA328PB-AU, MF="Microchip Technology", MP=ATMEGA328PB-AU, Pricing 1="1=1.47000, 25=1.35320, 100=1.23200 (USD)", REACH SVHC=Yes, RoHS=Yes, RoHS Compliant=Yes, SnapEDA_Link=https://www.snapeda.com/parts/ATMEGA328PB-AU/Microchip/view-part/4478285/?ref=snap, Supplier 1=Digi-Key, Technology=CMOS
U3: "Absolute, 7.25Psi Min, 16.67Psi Max, Rectangular, Surface Mount", Manufacturer="NXP Freescale", Max Operating Temperature=105°C, Max Supply Voltage=5.5V, Min Operating Temperature=-40°C, Min Supply Voltage=2.375V, Operating Current-Max=10uA, Package="LGA-8 NXP Semiconductors", Package Shape/Style=Rectangular, Supplier Part Number 1=MPL115A2-ND, Availability=Unavailable, Body Breadth=3inch, Body Height=1.2mm, Body Length or Diameter=5mm, Category="Pressure Sensors", ComponentLink1Description=https://datasheet.ciiva.com:443/pdfs/VipMasterIC/IC/PHGL/PHGL-S-A0003556458/PHGL-S-A0003556458-1.pdf?src-supplier=IHS+Markit, ComponentLink1URL=https://datasheet.ciiva.com:443/pdfs/VipMasterIC/IC/PHGL/PHGL-S-A0003556458/PHGL-S-A0003556458-1.pdf?src-supplier=IHS+Markit, ComponentLink2Description=https://datasheet.ciiva.com/2843/mpl115a2-2843361.pdf?src-supplier=Digi-Key, ComponentLink2URL=https://datasheet.ciiva.com/2843/mpl115a2-2843361.pdf?src-supplier=Digi-Key, ComponentLink3Description=https://datasheet.ciiva.com/3272/mpl115a2-3272679.pdf?src-supplier=Avnet, ComponentLink3URL=https://datasheet.ciiva.com/3272/mpl115a2-3272679.pdf?src-supplier=Avnet, ComponentLink4Description=https://datasheet.ciiva.com/1578/mpl115a2-1578868.pdf?src-supplier=Farnell, ComponentLink4URL=https://datasheet.ciiva.com/1578/mpl115a2-1578868.pdf?src-supplier=Farnell, ComponentLink5Description=https://datasheet.ciiva.com/26808/getdatasheetpartid-254526-26808246.pdf?src-supplier=Verical, ComponentLink5URL=https://datasheet.ciiva.com/26808/getdatasheetpartid-254526-26808246.pdf?src-supplier=Verical, ComponentLink6Description=https://datasheet.ciiva.com/26023/mpl115a2-26023221.pdf?src-supplier=Avnet+Europe, ComponentLink6URL=https://datasheet.ciiva.com/26023/mpl115a2-26023221.pdf?src-supplier=Avnet+Europe, ComponentLink7Description=https://datasheet.ciiva.com/1513/1789292-1513797.pdf?src-supplier=Element14, ComponentLink7URL=https://datasheet.ciiva.com/1513/1789292-1513797.pdf?src-supplier=Element14, ComponentLink8Description=https://datasheet.ciiva.com/1513/1789292-1513908.pdf?src-supplier=Element14, ComponentLink8URL=https://datasheet.ciiva.com/1513/1789292-1513908.pdf?src-supplier=Element14, Manufacturer Part Number=MPL115A2, MF="NXP USA", Mount="Surface Mount", Mouser-Purchase-URL=https://snapeda.com/shop?store=Mouser&id=494170, MP=MPL115A2, Output Interface Type=I2C, Output Type="DIGITAL OUTPUT", Port Type=HOLE, Pressure Range-Max=16.67PSI, Pressure Range-Min=7.25PSI, Pressure Type=Absolute, Price=None, Pricing 1="1=7.73000, 5=6.82400, 10=6.02800, 25=5.95800 (USD)", REACH SVHC=Yes, RoHS=Yes, RoHS Compliant=Yes, Sensors/Transducers Type="PRESSURE SENSOR,PEIZORESISTIVE", SnapEDA_Link=https://www.snapeda.com/parts/MPL115A2/NXP%20USA%20Inc./view-part/494170/?ref=snap, Stock 1=4480, Supplier 1=Digi-Key, Termination=Solder
U4: "Analog Circuit, 1 Func, CMOS", Manufacturer="TDK InvenSense", Max Operating Temperature=85°C, Min Operating Temperature=-40°C, Package="VFQFN-24 TDK InvenSense", Package Code=HVQCCN, Package Equivalence Code=LCC24,.16SQ,20, Package Shape=Square, Package Style="CHIP CARRIER, HEAT SINK/SLUG, VERY THIN PROFILEMeter", Power Supplies=1.8,2.5/3.3V, Supplier Part Number 1=1428-1007-1-ND, Supply Voltage-Max (Vsup)=3.46V, Supply Voltage-Min (Vsup)=2.375V, Supply Voltage-Nom (Vsup)=2.5V, Temperature Grade=INDUSTRIAL, Analog IC - Other Type="ANALOG CIRCUIT", Availability=Unavailable, Category="Inertial Measurement Units (IMUs)", ComponentLink1Description=https://datasheet.ciiva.com:443/pdfs/VipMasterIC/IC/IVNC/IVNCS00058/IVNCS00058-1.pdf?src-supplier=IHS+Markit, ComponentLink1URL=https://datasheet.ciiva.com:443/pdfs/VipMasterIC/IC/IVNC/IVNCS00058/IVNCS00058-1.pdf?src-supplier=IHS+Markit, ComponentLink2Description=https://datasheet.ciiva.com/1513/1788002-1513632.pdf?src-supplier=Element14, ComponentLink2URL=https://datasheet.ciiva.com/1513/1788002-1513632.pdf?src-supplier=Element14, ComponentLink3Description=https://datasheet.ciiva.com/22731/1788002-22731434.pdf?src-supplier=Element14, ComponentLink3URL=https://datasheet.ciiva.com/22731/1788002-22731434.pdf?src-supplier=Element14, Height - Seated (Max)=0.95mm, JESD-30 Code=S-XQCC-N24, JESD-609 Code=e4, Length=4mm, Manufacturer Part Number=MPU-6050, MF="TDK InvenSense", Moisture Sensitivity Level=3, MP=MPU-6050, Number of Functions=1, Number of Pins=24, Price=None, Pricing 1="1=10.70000, 5=6.95000, 10=6.25500, 25=5.56000, 50=5.14300, 100=4.44800, 500=4.17000, 1000=3.89200 (USD)", Qualification Status="Not Qualified", REACH SVHC="No SVHC", RoHS=Yes, RoHS Compliant=Yes, SnapEDA_Link=https://www.snapeda.com/parts/MPU-6050/TDK%20InvenSense/view-part/4503180/?ref=snap, Stock 1=4503, Supplier 1=Digi-Key, Surface Mount=Yes, Technology=CMOS, Terminal Finish=Nickel, Terminal Form="No Lead", Terminal Pitch=0.5mm, Terminal Position=QUAD, Width=4mm
U5 U6: library part "7 SEG DISPLAY IC", "Seven Segment Decoder/Driver, 4000/14000/40000 Series, Configurable Output, CMOS, PDSO16", Manufacturer="Texas Instruments", Max Operating Temperature=125°C, Min Operating Temperature=-55°C, Package Body Material=Plastic, Package Code=SOP, Package Shape=Rectangular, Package Style="SMALL OUTLINEMeter", Peak Reflow Temperature (Cel)=260°C, Supplier Part Number 1=296-31539-1-ND, Supply Voltage-Max (Vsup)=18V, Supply Voltage-Min (Vsup)=3V, Supply Voltage-Nom (Vsup)=5V, Temperature Grade=MILITARY, Category="Decoders and Multiplexers", ComponentLink1Description=https://www.ti.com:443/lit/ds/symlink/cd4543b.pdf?src-supplier=IHS+Markit, ComponentLink1URL=https://www.ti.com:443/lit/ds/symlink/cd4543b.pdf?src-supplier=IHS+Markit, ComponentLink2Description=https://datasheet.ciiva.com/15092/getdatasheetpartid-635761-15092907.pdf?src-supplier=Verical, ComponentLink2URL=https://datasheet.ciiva.com/15092/getdatasheetpartid-635761-15092907.pdf?src-supplier=Verical, ComponentLink3Description=https://datasheet.ciiva.com/41457/001013540-da-01-en-ic-bcd-7seg-ltch-cd4543bm96-soic-16-tid-41457278.pdf?src-supplier=Conrad, ComponentLink3URL=https://datasheet.ciiva.com/41457/001013540-da-01-en-ic-bcd-7seg-ltch-cd4543bm96-soic-16-tid-41457278.pdf?src-supplier=Conrad, ComponentLink4Description=https://datasheet.ciiva.com/6612/cd4543b-6612264.pdf?src-supplier=Digi-Key, ComponentLink4URL=https://datasheet.ciiva.com/6612/cd4543b-6612264.pdf?src-supplier=Digi-Key, ComponentLink5Description=https://datasheet.ciiva.com/6612/cd4543b-6612265.pdf?src-supplier=Digi-Key, ComponentLink5URL=https://datasheet.ciiva.com/6612/cd4543b-6612265.pdf?src-supplier=Digi-Key, ComponentLink6Description=https://datasheet.ciiva.com/6612/cd4543b-6612267.pdf?src-supplier=Digi-Key, ComponentLink6URL=https://datasheet.ciiva.com/6612/cd4543b-6612267.pdf?src-supplier=Digi-Key, Height - Seated (Max)=1.75mm, Input Conditioning=LATCHED, JESD-30 Code=R-PDSO-G16, JESD-609 Code=e4, Length=9.9mm, Logic IC Type="SEVEN SEGMENT DECODER/DRIVER", Manufacturer Part Number=CD4543BM96, Moisture Sensitivity Level=1, Number of Functions=1, Number of Pins=16, Output Polarity=Configurable, Pricing 1="1=0.44000, 10=0.37800, 25=0.35240, 100=0.28200, 250=0.26184, 500=0.22154, 1000=0.17119 (USD)", Propagation Delay (tpd)=1200ns, Qualification Status="Not Qualified", REACH SVHC=Yes, RoHS=Yes, RoHS Compliant=Yes, Stock 1=1242, Supplier 1=Digi-Key, Surface Mount=Yes, Technology=CMOS, Terminal Finish=Nickel, Terminal Form="Gull Wing", Terminal Pitch=1.27mm, Terminal Position=DUAL, Width=3.9mm

## Via types
v1: diameter 24, hole 12, Top Layer to Bottom Layer, tented both sides, 368 vias
v2: diameter 40, hole 20, Top Layer to Bottom Layer, tented both sides, 63 vias

## Nets (pads, with @x,y where several pads share a name; then routed paths per layer and width w, separated by ;. In a path a pad name is that pad's centre, name@x,y a point inside that pad or via, vN(x,y) a via of type N, cw(c..) or ccw(c..) an arc to the next point about the centre after c; other vN are vias at no path point)
5V0: C1.2 C2.2 C3.2 C4.2 C5.2 C6.2 C7.2 C9.2 DS1.3 DS1.8 DS2.3 DS2.8 DS3.3 DS3.8 DS4.3 DS4.8 J1.1 J2.1 R4.1 R5.1 S1.2 S2.1 S2.2 U1.20 U2.4 U2.18 U2.20 U3.1 U4.8 U4.13 U5.1 U5.6 U5.16 U6.1 U6.6 U6.16 | length 3739.1
  Top Layer w10: U5.1 60,365 ; U5.16 60,365 ; DS1.3@230,909.72 DS1.3 v2(235,995) ; DS1.8@230,1490.28 DS1.8 v2(235,1400) ; U5.6 310,251.97 212.71,349.26 190.74,349.26 v2(185,355) 123.44,355 113.44,365 60,365 ; U6.16@539.57,430.31 U6.16 545,375 ; U6.1 545,375 ; v2(678.47,362.18) v2@678.47,373.5 ; DS2.3 725,907.05 v2(725,995) ; DS2.8 722.67,1407.33 v2(725,1405) ; U6.6 795,256.97 v2@678.47,373.5 ; DS3.3 v2(1175,995) ; v2(1175,1385) DS3.8 ; DS4.3 v2(1645,1020) ; v2(1645,1385) DS4.8 ; C7.2 1936.97,1533.5 1985.28,1581.82 1998.5,1581.82 U3.1 2015,1588.82 2040.64,1563.18 2040.64,1537.24 2059.27,1518.61 2102.52,1518.61 2115,1506.12 2115,1490.86 2120.86,1485 R5.1 2156.5,1483.5 2223.5,1483.5 R4.1 ; U4.8 2315.47,827.08 2322.54,834.15 2331.17,834.15 2344.01,846.99 2358.52,846.99 2384.73,820.79 2482.28,820.79 C9.2 ; U2.18 2331.26,201.1 2342.93,212.77 2342.93,215.66 2348.2,220.93 2362.76,220.93 ; v2(2365,290) 2366.51,291.51 2451.51,291.51 v2(2455,295) ; v2@2370,288.03 2362.76,280.78 2362.76,220.93 ; v2@2370,295 2365,300 2365,350 ; C4.2 2394.25,110.75 U2.20 2394.25,201.1 2382.58,212.77 2382.58,215.66 2377.31,220.93 2362.76,220.93 ; C6.2 2425.75,574.25 U2.4 2425.75,443.82 2365,383.07 2365,350 ; v2(2455,350) 2365,350 ; C3.2 C3.2@2915,1101.5 ; 545,375 676.97,375 v2@678.47,373.5
  Top Layer w15: J1.1 3040,550.47 3118.5,471.97 C1.2 3117.36,468.86 U1.20
  Bottom Layer w10: v2(2455,295) v2(2455,350)
  other v2: 2352.13,846.99
CAL_GPIO: S2.3 S2.4 U2.8 | length 1322.7
  Top Layer w10: U2.8 2299.76,614.76 2320,635 2336.65,651.65 2367.43,651.65 2380.87,638.21 2523.21,638.21 2566.57,681.57 S2.3 S2.4
GND: C1.1 C2.1 C3.1 C4.1 C5.1 C6.1 C7.1 C8.1 C9.1 C10.1 C11.1 C12.1 D1.1 D1.2 D1.3 J1.2 J4.1 P1.5 P1.S1 P1.S2 P1.S3 P1.S4 P1.S5 P1.S6 R6.2 R21.1 R22.1 R24.1 R25.1 R26.1 R27.1 R28.1 R29.1 R30.1 R31.1 R32.1 R33.1 R34.1 R35.1 R36.1 R37.1 R38.1 U1.7 U1.18 U1.21 U1.25 U1.26 U2.5 U2.21 U3.3 U4.18 U5.8 U6.8 | length 217.7
  Top Layer w7: D1.2 D1.2@1970.92,1083.47 ; v2(2270,105) 2327.01,105 C4.1 ; 2425,235 2425,181.18 U2.21 ; P1.S1 3198.07,667.32 P1.S5
  other v1: 75,45 2675,45 2740,45 2805,45 2870,45 2935,45 3065,45 3130,45 3195,45 3260,45 432.5,110 497.5,110 562.5,110 2642.5,110 2707.5,110 2772.5,110 2837.5,110 3292.5,110 465,175 2740,175 2870,175 3130,175 3195,175 3260,175 497.5,240 952.5,240 1147.5,240 1732.5,240 2902.5,240 2967.5,240 3032.5,240 3162.5,240 3227.5,240 3292.5,240 205,305 335,305 400,305 465,305 660,305 855,305 920,305 985,305 1050,305 1115,305 1180,305 1245,305 1310,305 1375,305 1440,305 1505,305 1570,305 1635,305 1700,305 1765,305 1830,305 1895,305 1960,305 2870,305 2935,305 3000,305 3065,305 3260,305 497.5,370 952.5,370 1017.5,370 1082.5,370 1147.5,370 1212.5,370 465,435 1440,435 2740,435 2870,435 497.5,500 1147.5,500 1732.5,500 1862.5,500 1927.5,500 1992.5,500 2057.5,500 2577.5,500 2707.5,500 2902.5,500 2967.5,500 3032.5,500 3227.5,500 75,565 530,565 855,565 985,565 1050,565 1115,565 1180,565 1245,565 1310,565 1375,565 1440,565 1505,565 1570,565 1635,565 1700,565 1765,565 1830,565 1895,565 1960,565 2025,565 2090,565 2545,565 2675,565 2740,565 2870,565 2935,565 3000,565 3130,565 367.5,630 497.5,630 692.5,630 757.5,630 887.5,630 1017.5,630 1082.5,630 1147.5,630 1212.5,630 1277.5,630 1342.5,630 1407.5,630 1472.5,630 1537.5,630 1602.5,630 1667.5,630 1732.5,630 1797.5,630 1862.5,630 1927.5,630 1992.5,630 2057.5,630 2707.5,630 2902.5,630 2967.5,630 3097.5,630 400,695 530,695 725,695 855,695 1180,695 1310,695 1375,695 1440,695 1635,695 1830,695 1895,695 1960,695 2155,695 2220,695 2480,695 2870,695 2935,695 3000,695 1927.5,760 2122.5,760 2187.5,760 2512.5,760 2902.5,760 2967.5,760 2090,825 2155,825 2610,825 2870,825 2935,825 2122.5,890 2317.5,890 2642.5,890 2902.5,890 2967.5,890 2090,955 2480,955 2610,955 2740,955 2870,955 2935,955 3000,955 3065,955 1927.5,1020 1992.5,1020 2057.5,1020 2122.5,1020 2642.5,1020 2707.5,1020 2772.5,1020 2837.5,1020 2902.5,1020 2967.5,1020 3032.5,1020 3292.5,1020 2090,1085 2155,1085 2610,1085 2675,1085 2740,1085 3260,1085 1927.5,1150 1992.5,1150 2057.5,1150 2122.5,1150 2187.5,1150 2252.5,1150 2382.5,1150 2447.5,1150 2512.5,1150 2642.5,1150 2707.5,1150 2772.5,1150 3227.5,1150 3292.5,1150 1895,1215 1960,1215 2025,1215 2090,1215 2155,1215 2220,1215 2350,1215 2415,1215 2480,1215 2610,1215 2675,1215 2740,1215 3260,1215 1927.5,1280 1992.5,1280 2057.5,1280 2122.5,1280 2187.5,1280 2252.5,1280 2382.5,1280 2447.5,1280 2512.5,1280 2642.5,1280 2707.5,1280 2772.5,1280 2837.5,1280 3097.5,1280 3227.5,1280 3292.5,1280 1895,1345 1960,1345 2025,1345 2090,1345 2350,1345 2415,1345 2480,1345 2610,1345 2675,1345 2805,1345 2870,1345 3260,1345 2317.5,1410 2382.5,1410 2447.5,1410 2642.5,1410 2837.5,1410 2902.5,1410 2967.5,1410 3292.5,1410 2350,1475 2415,1475 2480,1475 2610,1475 2675,1475 2740,1475 2805,1475 2870,1475 2935,1475 3000,1475 3260,1475 2317.5,1540 2382.5,1540 2447.5,1540 2512.5,1540 2642.5,1540 2707.5,1540 2837.5,1540 2902.5,1540 2967.5,1540 3032.5,1540 3292.5,1540 2350,1605 2415,1605 2480,1605 2675,1605 2870,1605 2935,1605 3000,1605 3065,1605 3260,1605 1017.5,1670 1147.5,1670 1407.5,1670 1472.5,1670 1862.5,1670 1927.5,1670 1992.5,1670 2057.5,1670 2252.5,1670 2317.5,1670 2382.5,1670 2447.5,1670 2512.5,1670 2577.5,1670 2642.5,1670 2707.5,1670 2772.5,1670 2837.5,1670 2902.5,1670 2967.5,1670 3032.5,1670 3097.5,1670 3162.5,1670 3227.5,1670 3292.5,1670 75,1735 140,1735 205,1735 270,1735 335,1735 400,1735 465,1735 530,1735 595,1735 660,1735 725,1735 790,1735 855,1735 920,1735 985,1735 1050,1735 1115,1735 1180,1735 1245,1735 1310,1735 1375,1735 1440,1735 1505,1735 1570,1735 1635,1735 1700,1735 1765,1735 1830,1735 1895,1735 1960,1735 2025,1735 2090,1735 2155,1735 2220,1735 2285,1735 2350,1735 2415,1735 2480,1735 2545,1735 2610,1735 2675,1735 2740,1735 2805,1735 2870,1735 2935,1735 3000,1735 3065,1735 3130,1735 3195,1735 3260,1735
I2C1_SCK: R4.2 TP4.1 U2.28 U3.8 U4.23 | length 1793.4
  Top Layer w10: U3.8 2179.21,1588.82 2228.89,1539.14 R4.2@2230.86,1539.14 ; TP4.1 2315.47,1279.53 U4.23 ; TP4.1@2225,1380 2225,1429.67 2255.65,1460.32 2255.65,1539.14 R4.2@2230.86,1539.14 ; R4.2 R4.2@2230.86,1539.14 ; U2.28 2574.8,329.02 2638.55,329.02 v2(2638.79,328.79)
  Bottom Layer w10: v2(2315.47,1085) 2420,980.47 2420,568.97 2561.09,427.89 2561.09,408.91 2638.79,331.21 v2(2638.79,328.79)
I2C1_SDA: R5.2 TP3.1 U2.27 U3.7 U4.24 | length 2170.6
  Top Layer w10: U3.7 2146.61,1539.61 R5.2 2153.03,1547.99 2133.2,1567.82 2059.27,1567.82 2054,1573.09 2054,1604.55 2064.38,1614.93 2144.62,1614.93 2155,1625.31 TP3.1 ; TP3.1@2160,1665 TP3.1 ; v2(2199.63,1665.55) 2194.08,1660 TP3.1 ; v2(2265,1085) 2265,1039.88 2295.79,1009.09 U4.24 ; v2(2515,300) 2516.12,298.88 2573.44,298.88 U2.27
  Bottom Layer w10: v2(2199.63,1665.55) 2285.47,1579.7 2285.47,1113.59 2265,1093.12 v2(2265,1085) 2405,945 2405,564.17 2547.09,422.09 2547.09,397.23 2529.51,379.66 2520.86,379.66 2515,373.8 v2(2515,300)
MISO: J2.2 TP11.1 U2.16 U6.3 | length 2895.8
  Top Layer w10: U6.3 639.39,224.39 639.39,164.02 v2(633.79,158.41) 639.53,152.67 639.53,130.47 TP11.1@670,100 ; U2.16 2247.3,236.63 2303.42,236.63 v2(2305.29,238.5)
  Bottom Layer w10: v2(633.79,158.41) 633.79,156.56 690.35,100 2212.57,100 2242.57,130 2243,130 2305.29,192.29 v2(2305.29,238.5) 2386.08,238.5 2412.57,265 2580.2,265 2610.2,295 2657.43,295 2676.97,275.46 2685.25,275.46 2800,390.2 J2.2
MOSI: J3.1 TP10.1 U2.15 U6.5 | length 2943
  Top Layer w10: U6.5 745,164.19 v2(744.4,163.59) 770,138 TP10.1@770,100 ; v2(1935,160) 1935,168.12 1945.74,178.86 1945.74,180.74 2030,265 2244.17,265 U2.15 ; v2(2355,621.65) 2357.56,624.21 2533.15,624.21 2623.53,714.59 2695.77,786.83 2695.77,815.77 J3.1
  Bottom Layer w10: v2(744.4,163.59) 746.66,163.59 765.26,145 1895,145 1904.26,154.26 1929.26,154.26 v2(1935,160) 2045,160 2125,240 2125,542.23 2210.43,627.65 2334.14,627.65 2334.4,627.39 2349.26,627.39 v2(2355,621.65)
NetC8_2: C8.2 U3.2 | length 102.5
  Top Layer w10: C8.2 1936.97,1472.99 1989,1525.02 1989,1532.61 1996,1539.61 U3.2
NetC10_2: C10.2 U4.10 | length 58.8
  Top Layer w10: C10.2 2354.84,738.35 U4.10
NetC11_2: C11.2 C12.2 U4.20 | length 147.4
  Top Layer w10: U4.20 2374.53,957.99 2375,958.46 C12.2 C11.2
NetD1_4: D1.4 R3.1 | length 85.5
  Top Layer w10: R3.1 1915.44,930.6 1931.07,946.23 D1.4
NetD1_5: D1.5 R2.1 | length 79
  Top Layer w10: R2.1 D1.5
NetD1_6: D1.6 R1.1 | length 87.5
  Top Layer w10: D1.6 2009.81,950.67 2025,935.48 2025,880.4 R1.1
NetD2_2: D2.2 R33.2 | length 94.8
  Top Layer w10: R33.2 1641.57,427.01 1647.43,432.87 1647.43,438.98 1672.18,463.72 D2.2
NetD2_5: D2.5 U2.9 | length 445.9
  Top Layer w10: D2.5 1846.28,463.72 1854.76,455.24 U2.9
NetD3_2: D3.2 R34.2 | length 88.5
  Top Layer w10: R34.2 1606.97,190 1636.48,219.52 1680.37,219.52 D3.2
NetD3_5: D3.5 U2.12 | length 501.1
  Top Layer w10: D3.5 1918.85,218.85 2040,340 2155,340 2175.75,360.75 U2.12
NetD4_1: D4.1 R35.2 | length 76.5
  Top Layer w10: R35.2 1358.03,490 1371.12,503.09 D4.1
NetD4_6: D4.6 U2.10 | length 864.4
  Top Layer w10: D4.6 1509.48,501.45 1538.55,501.45 1556.91,483.09 1556.91,388.86 1568.76,377 2147,377 2193.74,423.74 U2.10
NetD5_1: D5.1 R36.2 | length 73.2
  Top Layer w10: R36.2 1319.99,258.22 D5.1
NetD5_6: D5.6 U2.13 | length 908.5
  Top Layer w10: D5.6 1516.7,258.22 1548.27,226.66 1548.27,166.53 1584.8,130 1828.7,130 1903.55,204.85 1930.26,204.85 2050.4,325 2241.18,325 U2.13
NetD6_3: D6.3 R37.2 | length 73
  Top Layer w10: R37.2 D6.3
NetD6_4: D6.4 U2.11 | length 1064.1
  Top Layer w10: D6.4 1218.87,424.35 1283.22,360 2155,360 2185,390 U2.11@2235,390
NetD7_3: D7.3 R38.2 | length 82.7
  Top Layer w10: R38.2@1014.7,185 1020.22,179.48 D7.3@1095.1,179.48
NetD7_4: D7.4 U2.14 | length 1137.8
  Top Layer w10: D7.4 1245.52,179.48 1310,115 1833.5,115 1909.35,190.85 1936.06,190.85 2042.96,297.76 U2.14
NetDS1_1: DS1.1 R11.2 | length 124.9
  Top Layer w15: R11.2 85,904.33 DS1.1
NetDS1_2: DS1.2 R10.2 | length 124.8
  Top Layer w10: R10.2 160,904.53 DS1.2
NetDS1_4: DS1.4 R9.2 | length 124.8
  Top Layer w10: DS1.4 310,904.53 R9.2
NetDS1_6: DS1.6 R8.2 | length 109.9
  Top Layer w15: DS1.6 385,1495.67 R8.2
NetDS1_7: DS1.7 R7.2 | length 109.8
  Top Layer w10: DS1.7 310,1495.47 R7.2
NetDS1_9: DS1.9 R12.2 | length 109.8
  Top Layer w10: R12.2 160,1495.47 DS1.9
NetDS1_10: DS1.10 R13.2 | length 124.2
  Top Layer w10: DS1.10 105,1514.88 R13.2@105,1611.33
NetDS2_1: DS2.1 R18.2 | length 115.5
  Top Layer w10: DS2.1 575,902.79 R18.2
NetDS2_2: DS2.2 R17.2 | length 116.8
  Top Layer w10: DS2.2 652.8,899.8 R17.2
NetDS2_4: DS2.4 R16.2 | length 115.8
  Top Layer w10: DS2.4 800,902.2 R16.2
NetDS2_6: DS2.6 R15.2 | length 112.9
  Top Layer w10: DS2.6 880,1503 R15.2
NetDS2_7: DS2.7 R14.2 | length 110.8
  Top Layer w10: DS2.7 800,1497.8 R14.2
NetDS2_9: DS2.9 R19.2 | length 110.6
  Top Layer w10: DS2.9 650,1497.4 R19.2
NetDS2_10: DS2.10 R20.2 | length 112.6
  Top Layer w10: DS2.10 580,1502.21 R20.2
NetDS3_1: DS3.1 R29.2 | length 124.9
  Top Layer w10: R29.2 1025,904.33 DS3.1
NetDS3_2: DS3.2 R27.2 | length 126.9
  Top Layer w10: R27.2 1095,899.53 DS3.2
NetDS3_4: DS3.4 R25.2 | length 124.8
  Top Layer w10: DS3.4 1250,904.53 R25.2
NetDS3_6: DS3.6 R23.2 | length 111.6
  Top Layer w10: R23.2 1320,1499.88 DS3.6
NetDS3_7: DS3.7 R21.2 | length 111.7
  Top Layer w10: R21.2 1245,1500.08 DS3.7
NetDS3_9: DS3.9 R31.2 | length 111.9
  Top Layer w10: R31.2 1095,1500.47 DS3.9
NetDS4_1: DS4.1 R30.2 | length 119.9
  Top Layer w15: R30.2 1495,904.33 DS4.1
NetDS4_2: DS4.2 R28.2 | length 121.7
  Top Layer w10: DS4.2 1575,899.92 R28.2
NetDS4_4: DS4.4 R26.2 | length 119.8
  Top Layer w10: DS4.4 1720,904.53 R26.2
NetDS4_6: DS4.6 R24.2 | length 109.9
  Top Layer w10: DS4.6 1795,1495.67 R24.2
NetDS4_7: DS4.7 R22.2 | length 111.7
  Top Layer w10: R22.2 1715,1500.08 DS4.7
NetDS4_9: DS4.9 R32.2 | length 109.8
  Top Layer w10: R32.2 1570,1495.47 DS4.9
NetR1_2: R1.2 U2.32 | length 824.7